# Altium PCB PCB1.PcbDoc
Units mm, origin at the board's own origin, x right, y up, seen from the top; angles counter-clockwise.
Board outline 68.2 x 88.27 mm, 2 copper layers (Top Layer, Bottom Layer); 35 components, 35 nets, 145 pads, 44 vias.
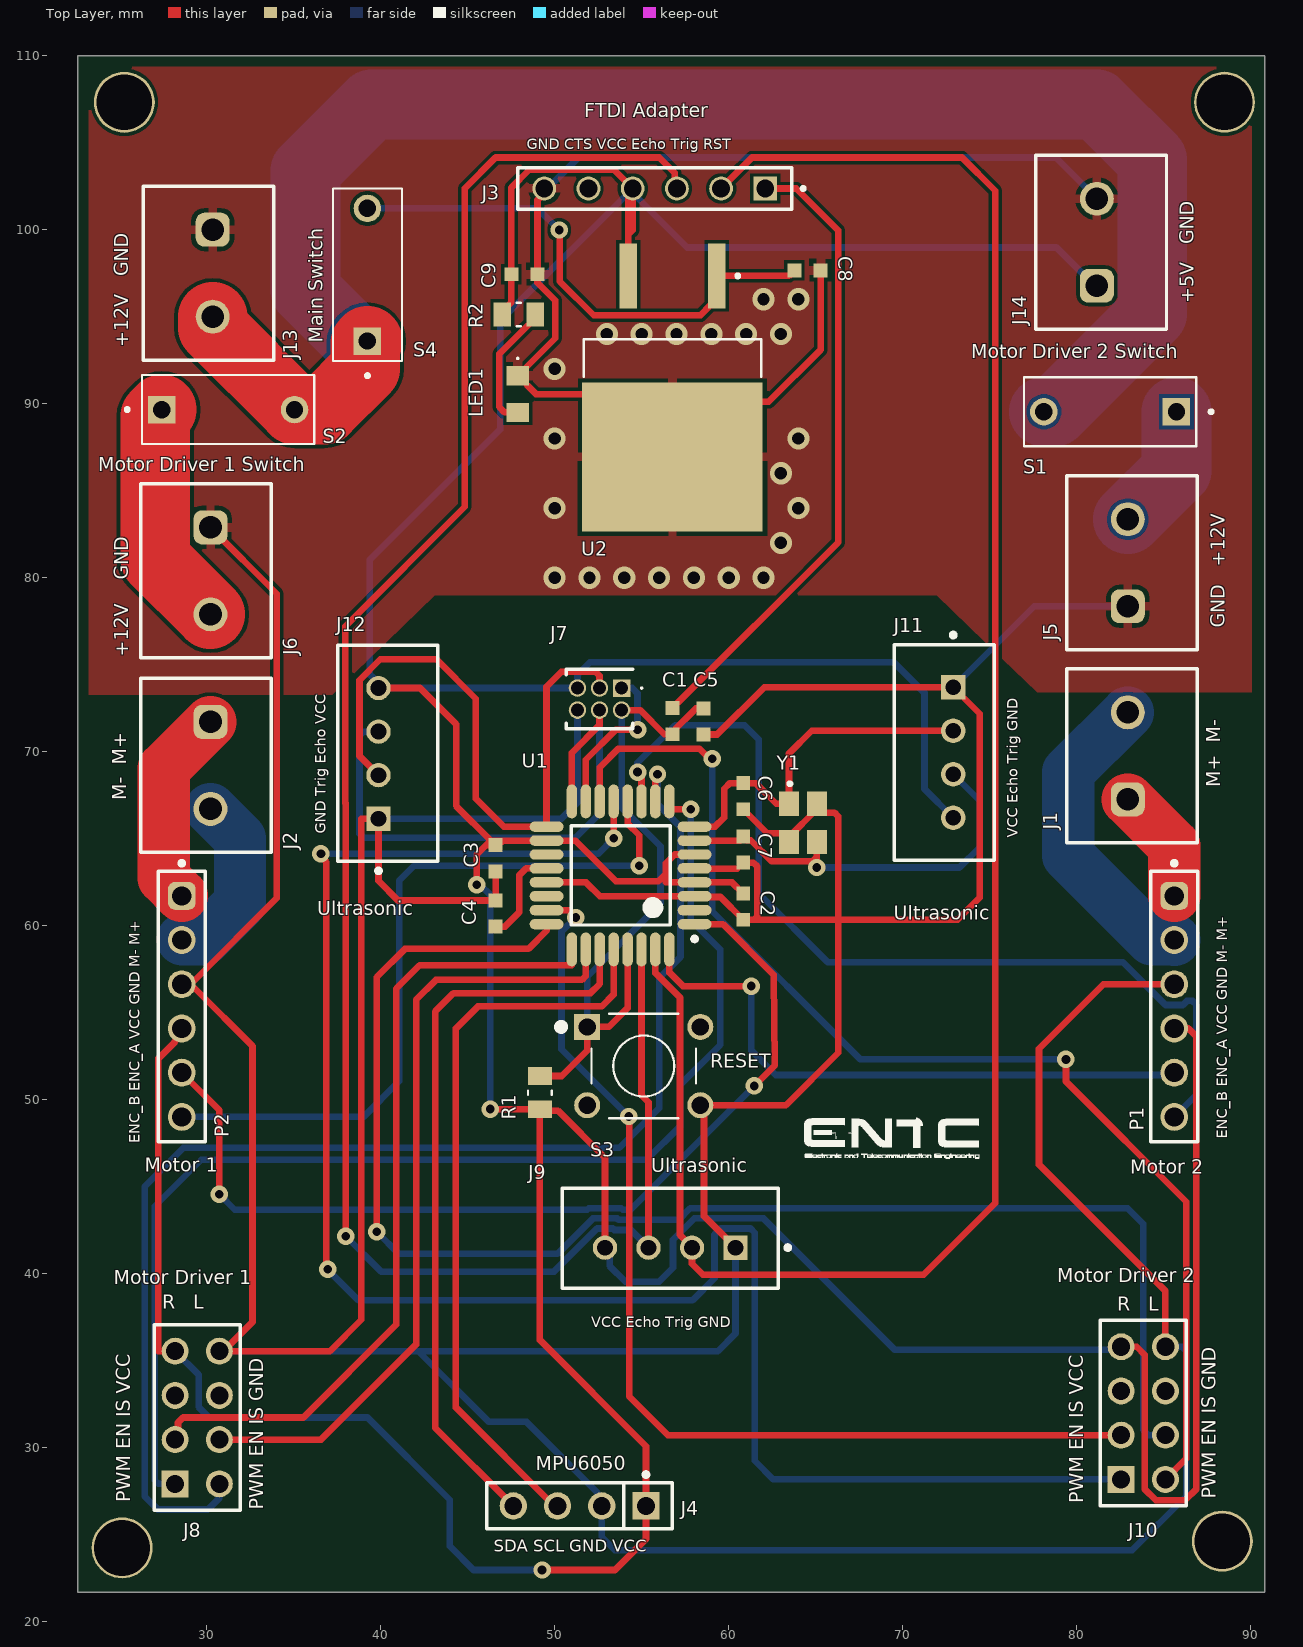
[diagram p0: Top Layer view]
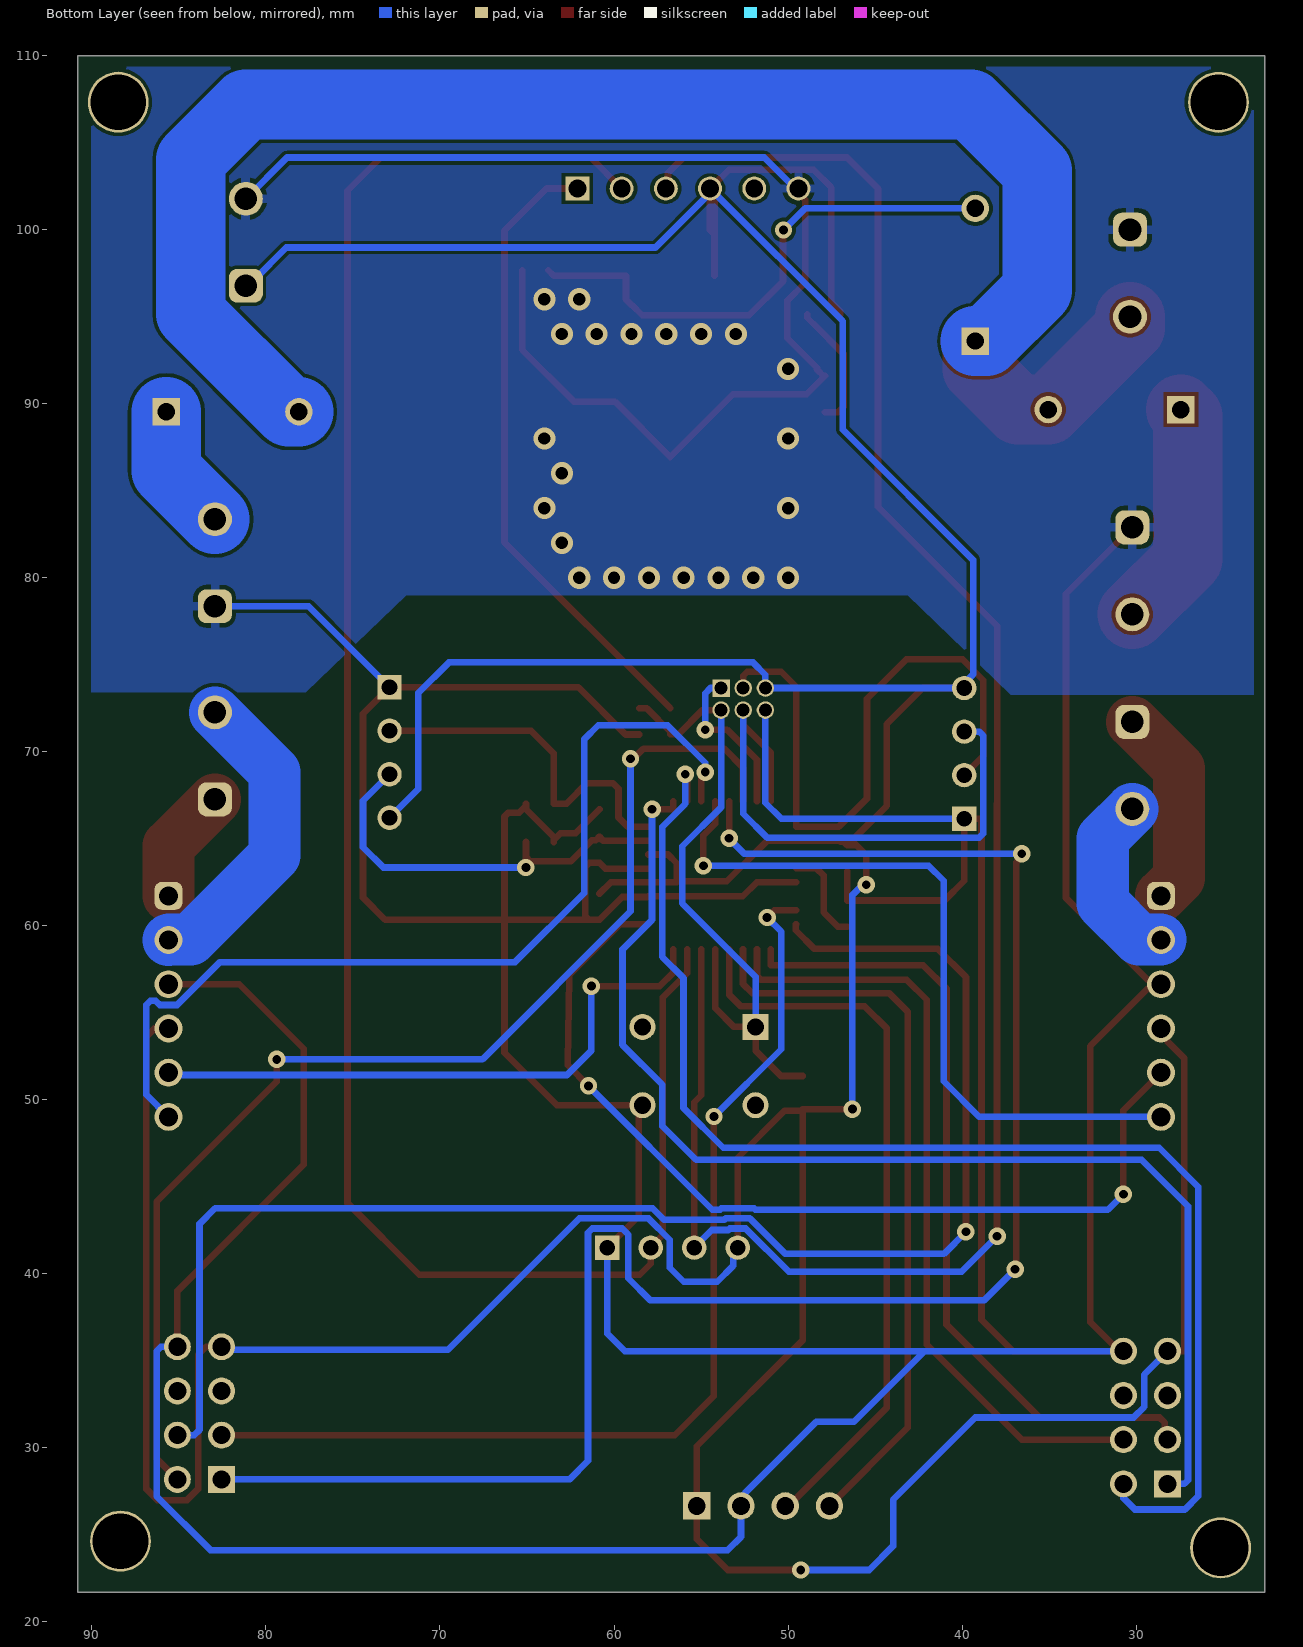
[diagram p1: Bottom Layer view, seen from below]
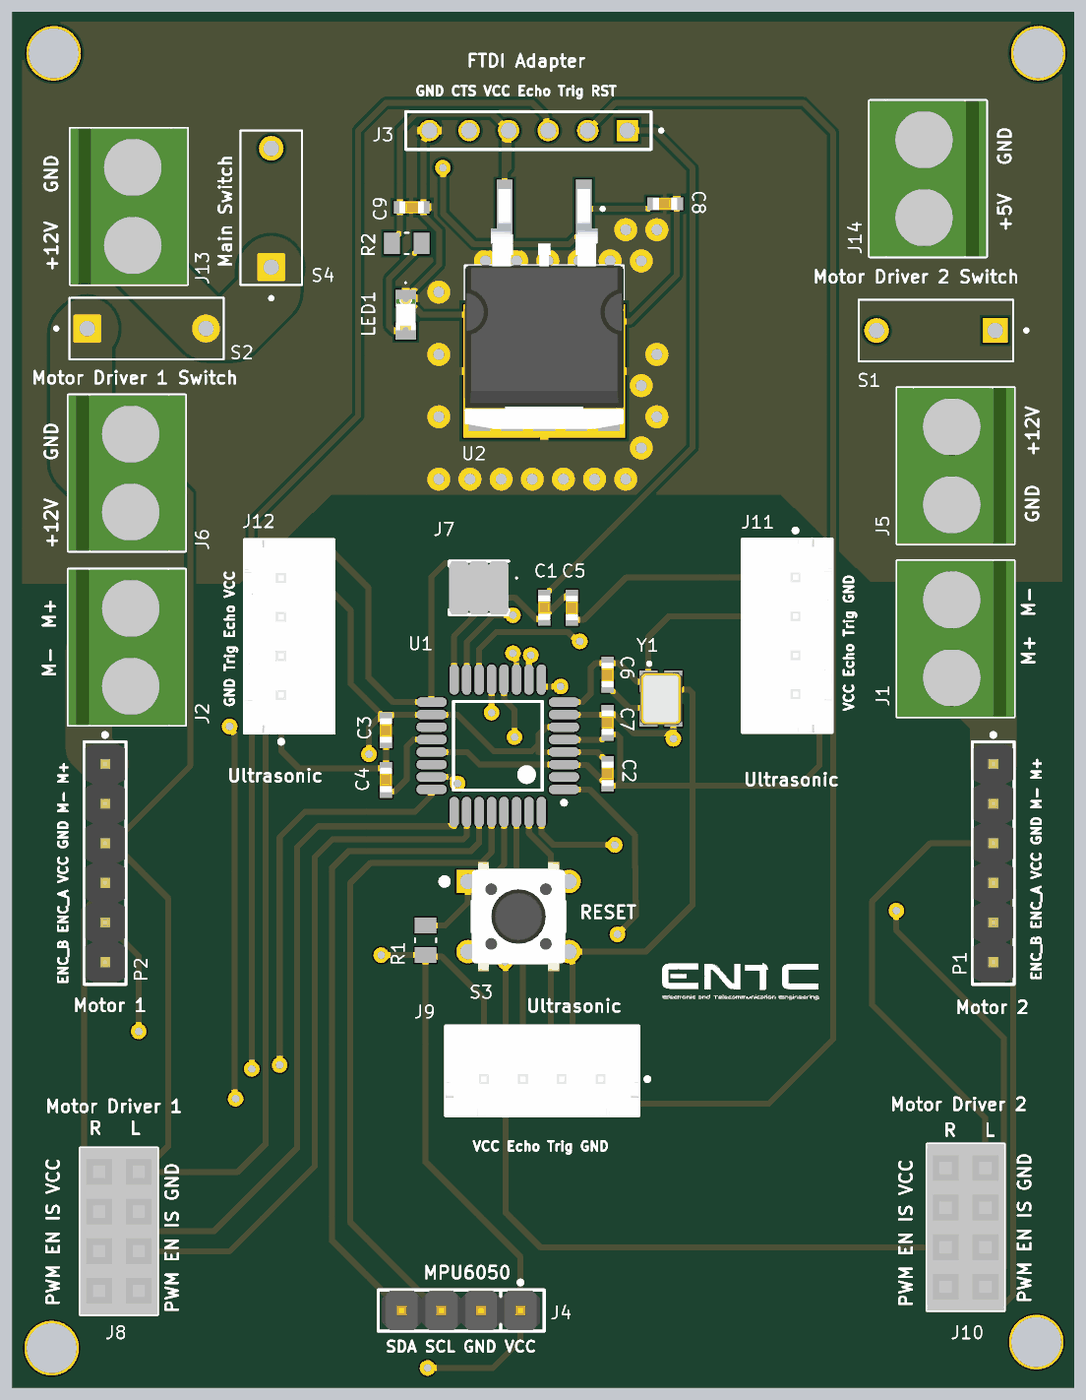
[diagram p2: 3D render of the assembled board from above, using the file's embedded part models]

## Layer stack, top to bottom
Top Solder: solder mask 0.0102, Solder Resist, Dk 3.5
Top Layer: signal copper 0.0356
Dielectric 1: dielectric 0.32, FR-4, Dk 4.8
Bottom Layer: signal copper 0.0356
Bottom Solder: solder mask 0.0102, Solder Resist, Dk 3.5

## Board outline
22.606,21.717 90.805,21.717 90.805,109.982 22.606,109.982

## Design rules (kind name [scope] priority, off if disabled: settings)
BoardOutlineClearance [All] p1: gap=0.2 ignorepadtopadclearanceinfootprint=FALSE except(0.4: Arc-SplitBarrior Arc-SplitContinuation Track-SplitBarrior Track-SplitContinuation SMDPad-SplitBarrior SMDPad-SplitContinuation THPad-SplitBarrior THPad-SplitContinuation Via-SplitBarrior Via-SplitContinuation Fill-SplitBarrior Fill-SplitContinuation Poly-SplitBarrior Poly-SplitContinuation Region-SplitBarrior Region-SplitContinuation Text-SplitBarrior Text-SplitContinuation)
Clearance "Clearance Bottom Layer" [OnLayer('Bottom Layer')] p1: gap=0.203 ignorepadtopadclearanceinfootprint=TRUE except(0.254: Arc-Text Track-Text SMDPad-Text THPad-Text Via-Text Fill-Text Poly-Text Region-Text Text-Text)
Clearance "Clearance Top Layer" [OnLayer('Top Layer')] p2: gap=0.203 ignorepadtopadclearanceinfootprint=TRUE except(0.254: Arc-Text Track-Text SMDPad-Text THPad-Text Via-Text Fill-Text Poly-Text Region-Text Text-Text)
Clearance [All] p3: gap=0.2 ignorepadtopadclearanceinfootprint=FALSE except(0.089: Arc-Arc Arc-Track Arc-SMDPad Track-Track Track-SMDPad SMDPad-SMDPad; 0.127: Arc-Via Track-Via SMDPad-Via THPad-Via Via-Via; 0.254: Arc-Text Track-Text SMDPad-Text THPad-Text Via-Text Fill-Text Poly-Text Region-Text Text-Text)
HoleSize [All] p1: absolutevalues=TRUE maxlimit=6.3 minlimit=0.2 maxpercent=80.000 minpercent=20.000
MinimumAnnularRing [All] p1: minimumring=0.076
MinimumSolderMaskSliver [All] p1: minsoldermaskwidth=0.1
PolygonConnect PolygonConnect_1 [All] p1: thpad.connectstyle=Relief thpad.reliefconductorwidth=0.508 thpad.reliefentries=4 thpad.polygonreliefangle="90 Angle" thpad.airgapwidth=0.254 smdpad.connectstyle=Relief smdpad.reliefconductorwidth=0.508 smdpad.reliefentries=4 smdpad.polygonreliefangle="90 Angle" smdpad.airgapwidth=0.254 via.connectstyle=Direct via.reliefconductorwidth=0.508 via.reliefentries=4 via.polygonreliefangle="90 Angle" via.airgapwidth=0.254
RoutingCorners [All] p1: cornerstyle=Round minsetback=2.54 maxsetback=2.54
RoutingVias [All] p1: holewidth=0.5 width=1 viastyle="Through Hole" minholewidth=0.2 minwidth=0.45 maxholewidth=1 maxwidth=2
SilkToSilkClearance [All] p1: silktosilkclearance=0.1
SilkToSolderMaskClearance [IsPad] p1: minsilkscreentomaskgap=0.1 clearancetoexposedcopper=TRUE
SolderMaskExpansion [All] p1: expansion=0.102 istentingtop=FALSE
Width motor_1_2 [InNet('NetJ1_2')] p1: maxlimit=4 minlimit=3 preferedwidth=4
Width motor_1_1 [InNet('NetJ1_1')] p2: maxlimit=4 minlimit=3 preferedwidth=4
Width motor_2_2 [InNet('NetJ2_2')] p3: maxlimit=4 minlimit=3 preferedwidth=4
Width motor_2_1 [InNet('NetJ2_1')] p4: maxlimit=4 minlimit=3 preferedwidth=4
Width 12V_3 [InNet('NetJ5_2')] p5: maxlimit=6 minlimit=4 preferedwidth=5
Width 12V_2 [InNet('NetJ6_2')] p6: maxlimit=6 minlimit=4 preferedwidth=5
Width 12V [InNet('+12V')] p7: maxlimit=6 minlimit=4 preferedwidth=5
Width [All] p8: maxlimit=2.54 minlimit=0.089 preferedwidth=0.381
25 further rules are at their usual default settings.

## Components (designator, comment, footprint, x,y, rotation, side; value= is the part's Value field where it differs from the comment)
C1 "100nF" WCAP-CSST_0603_L1.6W0.8H0.8_Reflow 56.769,71.755 r270 top
C2 "10nF" WCAP-CSST_0603_L1.6W0.8H0.8_Reflow 60.833,61.099 r90 top
C3 "10nF" WCAP-CSST_0603_L1.6W0.8H0.8_Reflow 46.609,63.881 r90 top
C4 "100nF" WCAP-CSST_0603_L1.6W0.8H0.8_Reflow 46.609,60.706 r270 top
C5 "100nF" WCAP-CSST_0603_L1.6W0.8H0.8_Reflow 58.547,71.743 r90 top
C6 "22pF" WCAP-CSGP_0603_L1.6W0.8H0.8_Reflow 60.833,67.449 r90 top
C7 "22pF" WCAP-CSGP_0603_L1.6W0.8H0.8_Reflow 60.833,64.377 r90 top
C8 "100nF" WCAP-CSST_0603_L1.6W0.8H0.8_Reflow 64.528,97.663 r180 top
C9 "100nF" WCAP-CSST_0603_L1.6W0.8H0.8_Reflow 48.26,97.434 r180 top
J1 "691137710002" 691137710002 83.181,69.763 r90 top
J2 "691137710002" 691137710002 29.972,69.215 r270 top
J3 "ESQ-106-59-G-S" SAMTEC_ESQ-106-59-G-S 62.103,102.362 r180 top
J4 "MPU6050" FP-M20-9990445-MFG 51.435,26.67 r180 top
J5 "691137710002" 691137710002 83.181,80.859 r90 top
J6 "691137710002" 691137710002 29.972,80.391 r270 top
J7 "20021111-00006T4LF" 2002111100006T4LF 53.848,73.66 r180 top
J8 "Motor Driver 1" SMTC-SSW-104-02-X-D 28.194,27.94 r90 top
J9 "Ultrasonic 1" FP-B4B-XH-A_LF_SN-MFG 56.642,42.037 r0 top
J10 "Motor Driver 2" SMTC-SSW-104-02-X-D 82.55,28.194 r90 top
J11 "Ultrasonic 2" FP-B4B-XH-A_LF_SN-MFG 72.373,69.957 r90 top
J12 "Ultrasonic 3" FP-B4B-XH-A_LF_SN-MFG 40.403,69.91 r270 top
J13 "691137710002" 691137710002 30.103,97.496 r270 top
J14 "691137710002" 691137710002 81.403,99.274 r90 top
LED1 "150080SS75000" 150080SS75000 47.879,90.551 r270 top
P1 "Motor 1" 61300611121 85.598,55.372 r270 top
P2 "Motor 2" 61300611121 28.575,55.372 r270 top
R1 "RMCF0805FG10K0" RESC2012X65N 49.149,50.419 r270 top value=10kohm
R2 "RMCF0805FG10K0" RESC2012X65N 47.945,95.123 r180 top value=10kohm
S1 "DS01-254-L-01BE" SW_DS01-254-L-01BE 81.915,89.535 r90 top
S2 "DS01-254-L-01BE" SW_DS01-254-L-01BE 31.242,89.662 r270 top
S3 "FSM8JH" SW_FSM8JH 55.118,51.943 r0 top
S4 "DS01-254-L-01BE" SW_DS01-254-L-01BE 39.243,97.409 r0 top
U1 "ATmega328P-AU" 32A_M 53.789,62.897 r180 top
U2 "7805CD2T" TO254P1542X460-3N 56.769,90.932 r270 top
Y1 "830072604" WE-XTAL_CFPX-180 64.262,65.913 r270 top

## Footprints (in the part's own frame and the unit in brackets; to place one, negate y for a bottom-side part, rotate by r counter-clockwise, add the part's x,y. Pads: shape width x height; smd on the part's side, far side on the other; paste and mask are expansions set on the pad)
32A_M [mm] "Thin QFP, 32-Leads, Body 7x7mm, Pitch 0.8mm, IPC Low Density"
  oval 1.95x0.6 smd: 1(-4.25,2.8) 2(-4.25,2) 3(-4.25,1.2) 4(-4.25,0.4) 5(-4.25,-0.4) 6(-4.25,-1.2) 7(-4.25,-2) 8(-4.25,-2.8) 17(4.25,-2.8) 18(4.25,-2) 19(4.25,-1.2) 20(4.25,-0.4) 21(4.25,0.4) 22(4.25,1.2) 23(4.25,2) 24(4.25,2.8)
  oval 0.6x1.95 smd: 9(-2.8,-4.25) 10(-2,-4.25) 11(-1.2,-4.25) 12(-0.4,-4.25) 13(0.4,-4.25) 14(1.2,-4.25) 15(2,-4.25) 16(2.8,-4.25) 25(2.8,4.25) 26(2,4.25) 27(1.2,4.25) 28(0.4,4.25) 29(-0.4,4.25) 30(-1.2,4.25) 31(-2,4.25) 32(-2.8,4.25)
  silkscreen extent -4.38,-2.85 2.85,3.77, body extent -3.5,-3.5 3.5,3.5, height 1.2
150080SS75000 [mm]
  rect 1.1x1.3 smd: 1(-1.05,0) 2(1.05,0)
  silkscreen extent -2.1,-0.05 -2,0.05, body extent -1,-0.63 1,0.63, height 0.7
61300611121 [mm] "Pin Header, pitch 2.54 mm, THT, Vertical, single row, 6p"
  rrect50% 1.6x1.6 hole 1.1: 1(-6.35,0)
  round 1.6 hole 1.1: 2(-3.81,0) 3(-1.27,0) 4(1.27,0) 5(3.81,0) 6(6.35,0)
  silkscreen extent -8.34,-1.34 7.77,1.34, body extent -7.62,-1.27 7.62,1.27, height 8.57
691137710002 [mm] "Horizontal Cable Entry with Pressure Clamp, pitch 5mm, 02p"
  rrect50% 1.95x1.95 hole 1.3: 1(-2.5,0.25)
  round 1.95 hole 1.3: 2(2.5,0.25)
  silkscreen extent -5,-3.75 5,3.75, body extent -5,-3.75 5,3.75, height 11.6
2002111100006T4LF [mm]
  rect 1x1 hole 0.75: 1(0,0)
  round 1 hole 0.75: 2(0,1.27) 3(1.27,0) 4(1.27,1.27) 5(2.54,0) 6(2.54,1.27)
  silkscreen extent -1.2,-1.08 3.17,2.35, body extent -0.64,-1.07 3.17,2.33, height 5.58
FP-B4B-XH-A_LF_SN-MFG [mm]
  rect 1.4x1.4 hole 0.9 paste-2539.97 mask+0: 1(3.75,-0.525)
  round 1.4 hole 0.9 paste-2539.97 mask+0: 2(1.25,-0.525) 3(-1.25,-0.525) 4(-3.75,-0.525)
  silkscreen extent -6.2,-2.87 6.88,2.88, body extent -6.3,-2.98 6.3,2.98, height 0.25
FP-M20-9990445-MFG [mm]
  rect 1.57x1.57 hole 1.02 paste-2539.97 mask+0: 1(-3.81,0)
  round 1.57 hole 1.02 paste-2539.97 mask+0: 2(-1.27,0) 3(1.27,0) 4(3.81,0)
  silkscreen extent -5.33,-1.92 5.33,1.32, body extent -5.43,-1.42 5.43,1.42, height 0.25
RESC2012X65N [mm]
  rect 1.01x1.38 smd: 1(-0.95,0) 2(0.95,0)
  silkscreen extent -0.12,-0.68 0.12,0.68
SAMTEC_ESQ-106-59-G-S [mm]
  rect 1.37x1.37 hole 1.02: 01(0,0)
  round 1.37 hole 1.02: 02(2.54,0) 03(5.08,0) 04(7.62,0) 05(10.16,0) 06(12.7,0)
  silkscreen extent -2.27,-1.2 14.23,1.2
SMTC-SSW-104-02-X-D [mm] "SQ Post Socket, 2x4 Pins, Vertical, 2.54mm Pitch, Female"
  rect 1.55x1.55 hole 1.04: 1(0,0)
  round 1.55 hole 1.04: 2(0,-2.54) 3(2.54,0) 4(2.54,-2.54) 5(5.08,0) 6(5.08,-2.54) 7(7.62,0) 8(7.62,-2.54)
  silkscreen extent -1.53,-3.74 9.15,1.2, body extent -1.52,-3.75 9.14,1.21, height 8.51
SW_DS01-254-L-01BE [mm]
  rect 1.58x1.58 / inner round 1.58 / far side rect 1.58x1.58 hole 1: 1A(0,-3.81)
  round 1.58 hole 1: 1B(0,3.81)
  silkscreen extent -1.98,-5.9 1.98,4.95
SW_FSM8JH [mm]
  rect 1.498x1.498 / inner round 1.498 / far side rect 1.498x1.498 hole 0.99: 1(-3.25,2.25)
  round 1.498 hole 0.99: 2(-3.25,-2.25) 3(3.25,2.25) 4(3.25,-2.25)
  silkscreen extent -4.95,-3 3,3, body extent -3,-3.95 3,3.95, height 9.5
TO254P1542X460-3N [mm]
  rect 3.74x1.02 smd: 1(-6.41,2.54) 2(-6.41,-2.54)
  rect 8.56x10.37 smd paste-6: 3(4,0)
  silkscreen extent -6.51,-5.1 -0.59,5.1, body extent -7.71,-5.1 7.71,5.1, height 4.6
WCAP-CSGP_0603_L1.6W0.8H0.8_Reflow [mm] "Ceramic Capacitors, body 1.6x0.8mm"
  rect 0.8x0.8 smd: 1(-0.75,0) 2(0.75,0)
  body extent -0.8,-0.4 0.8,0.4, height 0.8
WCAP-CSST_0603_L1.6W0.8H0.8_Reflow [mm] "Soft Termination MLCC, body 1.60x0.80mm"
  rect 0.8x0.8 smd: 1(-0.75,0) 2(0.75,0)
  body extent -0.8,-0.4 0.8,0.4, height 0.8
WE-XTAL_CFPX-180 [mm] "Quartz Crystal, size CFPX-180, body 3.4x2.7mm"
  rect 1.4x1.15 smd: 1(-1.1,-0.8) 2(1.1,-0.8) 3(1.1,0.8) 4(-1.1,0.8)
  silkscreen extent -2.35,-0.85 -2.15,-0.65, body extent -1.7,-1.35 1.7,1.35, height 0.65

## Part data
C1 C4 C5 C9: library part 885382206004, "WCAP-CSST Multilayer Ceramic Chip Capacitor, Soft Termination, size 0603, X7R Class II, 100nF, 50VDC", Capacitance Tolerance=+/-10%, Case/Size Code=0603, Insulation Resistance=5GOhm, Manufacturer="Wurth Elektronik", Operating Temperature Max=125°C, Operating Temperature Min=-55°C, Rated Voltage (DC)=50V, Capacitance=100nF, Category="Multilayer Ceramic Chip Capacitors", Ceramic Type="X7R Class II", ComponentLink1Description="Website Link", ComponentLink1URL=https://www.we-online.com/redexpert/article/885382206004?ad, ComponentLink2Description="Datasheet Link", ComponentLink2URL=https://www.we-online.com/redexpert/spec/885382206004?ad, Dissipation Factor=3%, Height=0.8mm, Length=1.6mm, Manufacturer Part Number=885382206004, Match Code=WCAP-CSST, Mount="Surface Mount", Packaging="Tape and Reel", Technical Reference=X7R0603104K050DFCT1S000, Width=0.8mm
C2 C3: library part 885382206002, "WCAP-CSST Multilayer Ceramic Chip Capacitor, Soft Termination, size 0603, X7R Class II, 10nF, 50VDC", Capacitance Tolerance=+/-10%, Case/Size Code=0603, Insulation Resistance=10GOhm, Manufacturer="Wurth Elektronik", Operating Temperature Max=125°C, Operating Temperature Min=-55°C, Rated Voltage (DC)=50V, Capacitance=10nF, Category="Multilayer Ceramic Chip Capacitors", Ceramic Type="X7R Class II", ComponentLink1Description="Website Link", ComponentLink1URL=https://www.we-online.com/redexpert/article/885382206002?ad, ComponentLink2Description="Datasheet Link", ComponentLink2URL=https://www.we-online.com/redexpert/spec/885382206002?ad, Dissipation Factor=2.5%, Height=0.8mm, Length=1.6mm, Manufacturer Part Number=885382206002, Match Code=WCAP-CSST, Mount="Surface Mount", Packaging="Tape and Reel", Technical Reference=X7R0603103K050DFCT1S000, Width=0.8mm
C6 C7: library part 885012006004, "WCAP-CSGP Multilayer Ceramic Chip Capacitor, General Purpose, size 0603, NP0, 22pF, 10VDC", Capacitance Tolerance=+/-5%, Case/Size Code=0603, Insulation Resistance=10GOhm, Manufacturer="Wurth Elektronik", Operating Temperature Max=125°C, Operating Temperature Min=-55°C, Rated Voltage (DC)=10V, Capacitance=22pF, Category="Multilayer Ceramic Chip Capacitors", Ceramic Type=NP0, ComponentLink1Description="Website Link", ComponentLink1URL=https://www.we-online.com/redexpert/article/885012006004?ad, ComponentLink2Description="Datasheet Link", ComponentLink2URL=https://www.we-online.com/redexpert/spec/885012006004?ad, Height=0.8mm, Length=1.6mm, Manufacturer Part Number=885012006004, Match Code=WCAP-CSGP, Mount="Surface Mount", Packaging="Tape and Reel", Q Factor=840, Technical Reference=NP00603220J010DFCT10000, Width=0.8mm
C8: library part 885382206004, "WCAP-CSST Multilayer Ceramic Chip Capacitor, Soft Termination, size 0603, X7R Class II, 100nF, 50VDC", Capacitance=0.33uF, Capacitance Tolerance=+/-10%, Case/Size Code=0603, Insulation Resistance=5GOhm, Manufacturer="Wurth Elektronik", Operating Temperature Max=125°C, Operating Temperature Min=-55°C, Rated Voltage (DC)=50V, Category="Multilayer Ceramic Chip Capacitors", Ceramic Type="X7R Class II", ComponentLink1Description="Website Link", ComponentLink1URL=https://www.we-online.com/redexpert/article/885382206004?ad, ComponentLink2Description="Datasheet Link", ComponentLink2URL=https://www.we-online.com/redexpert/spec/885382206004?ad, Dissipation Factor=3%, Height=0.8mm, Length=1.6mm, Manufacturer Part Number=885382206004, Match Code=WCAP-CSST, Mount="Surface Mount", Packaging="Tape and Reel", Technical Reference=X7R0603104K050DFCT1S000, Width=0.8mm
J1 J2 J5 J6 J13 J14: library part CMP-1502-03324-2, Current Rating=16A, Max Operating Temperature=120°C, Min Operating Temperature=-30°C, Voltage Rating=300V, Contact Material="Nickel, Tin", Height=11.6mm, Lead Pitch=5mm, NexarPartId=78871135, Number of Contacts=2, Number of Pins=2, Number of Rows=1, Packaging=Box, RoHS=Non-Compliant
J3 R1 R2: Package=None, Availability=Unavailable, Price=None
  J3: MP=ESQ-106-59-G-S
  R1 R2: MP=RMCF0805FG10K0
J4: library part CMP-00671-05399696-1, "M20-9990445 Conn Unshrouded Header HDR 4 POS 2.54mm Solder ST Thru-Hole Bulk/Loose", Case/Package=SIL, Color=Black, Contact Resistance=25mΩ, Current Rating=3A, Insulation Resistance=10GΩ, Max Operating Temperature=105°C, Min Operating Temperature=-40°C, Voltage Rating (AC)=750V, Connector Type="Male Pin", Contact Material="Brass, Bronze, Gold, Nickel", Contact Mating Length=6.096mm, Contact Plating=Gold, Depth=2.54mm, Gender=Male, Height=2.54mm, Housing Color=Black, Housing Material=Nylon, Lead Pitch=2.54mm, Length=10.16mm, Max Current Rating=3A, Mount="Through Hole", NexarPartId=5399696, Number of Contacts=4, Number of Pins=4, Number of Positions=4, Number of Rows=1, Orientation=Straight, Pitch=2.54mm, Radiation Hardening=No, REACH SVHC="No SVHC", RoHS=Compliant, Termination=Solder, Voltage Rating (DC)=750V, Weight=45.359237g, Width=12.7mm
J7: "Connector", Manufacturer_Name="Amphenol Communications Solutions", Arrow Part Number=20021111-00006T4LF, Arrow Price/Stock=https://www.arrow.com/en/products/20021111-00006t4lf/amphenol-fci?region=europe, Datasheet Link=https://cdn.amphenol-cs.com/media/wysiwyg/files/drawing/20021111.pdf, Height=5mm, Manufacturer_Part_Number=20021111-00006T4LF
J8 J10: library part CMP-1023-00343-1, "SQ Post Socket, Through-hole, Vertical, -55 to 125 degC, 2.54mm Pitch, 8-Pin, Female, RoHS", Manufacturer=Samtec, PartNumber=SSW-104-02-G-D, Temperature Range="-55 to 125 degC", ComponentLink1Description="Manufacturer URL", ComponentLink1URL=http://www.samtec.com, ComponentLink2Description=Datasheet, ComponentLink2URL=http://www.samtec.com/documents/webfiles/pdf/SSW_TH.PDF, ComponentLink3Description="Package Specification", ComponentLink3URL=http://www.samtec.com/documents/webfiles/cpdf/SSW-1XX-XX-XXX-X-XX-XXX-XX-MKT.pdf, DatasheetVersion=F-214, Mounting Technology=Through-hole, Orientation=Vertical, PackageDescription="Assembly, Socket Strip .016 X .031 Tail", PackageReference=SSW-104-02-X-D, PackageVersion="CA, 6/1987", Pitch="2.54 mm", RoHS=True
J9 J11 J12: library part CMP-17439-000250-1, "CONN HEADER VERT 4POS 2.5MM", Color=Natural, Contact Resistance=20mR, Current Rating=3A, Flammability Rating="UL94 V-0", Housing Color=White, Insulation Resistance=1GR, Max Operating Temperature=85°C, Max Voltage Rating (AC)=250V, Min Operating Temperature=-25°C, Package Quantity=500, Connector Type=Header, Contact Finish - Mating=TIN, Contact Material=Brass, Contact Plating=Tin, Contact Shape=Square, Contact Type="Male Pin", Depth=5.75mm, Fastening Type=Detent, Gender=Male, Housing Material=Polyamide, Insulation Color=Natural, Insulation Material=Nylon, Lead Free="Lead Free", Lead Pitch=2.5mm, Length=12.4mm, Mated Stacking Heights=9.8mm, Material=Polyamide, Max Current Rating=3A, Max Voltage Rating (DC)=250V, Mount="Through Hole", Number of Contacts=4, Number of Positions=4, Number of Rows=1, Orientation=Straight, Packaging=Bulk, Pitch=2.5mm, REACH SVHC="No SVHC", Series=XH, Termination=Solder, Voltage Rating=250V, Voltage Rating (AC)=250V, Wire/Cable Gauge=22AWG
LED1: "LED", Manufacturer_Name="Wurth Elektronik", Mouser Part Number=710-150080SS75000, Datasheet Link=https://www.we-online.com/components/products/datasheet/150080SS75000.pdf, Height=0.8mm, Manufacturer_Part_Number=150080SS75000, Mouser Price/Stock=https://www.mouser.co.uk/ProductDetail/Wurth-Elektronik/150080SS75000?qs=LlUlMxKIyB2zzpiaOzrUdw%3D%3D
P1 P2: library part CMP-1502-01070-3, Color=Black, Contact Resistance=20mΩ, Current Rating=3A, Max Operating Temperature=105°C, Min Operating Temperature=-40°C, Operating Supply Voltage=250V, Connector Type="Male Pin", Contact Gender=Male, Contact Material=Copper, Contact Mating Length=5.9944mm, Contact Plating=Gold, Gender=Male, Height=8.89mm, Housing Material=PBT, Lead Free="Lead Free", Lead Pitch=2.54mm, Mount="Through Hole", NexarPartId=20084590, Number of Contacts=6, Number of Pins=6, Number of Positions=6, Number of Rows=1, Orientation=Vertical, Packaging=Bulk, Pitch=2.54mm, REACH SVHC=Unknown, RoHS=Compliant, Termination="Through Hole", Voltage Rating=250V
S1 S2 S4: "1 Position, Through Hole, 2.54 mm Pitch, Raised Slide Actuator, Flat Bottom, Long Pin, DIP Switch", Package=None, Availability="In Stock", Check_prices=https://www.snapeda.com/parts/DS01-254-L-01BE/CUI+Devices/view-part/?ref=eda, CUI_purchase_URL=https://www.cuidevices.com/product/switches/dip-switches/ds01-254-series?utm_source=snapeda.com&utm_medium=referral&utm_campaign=snapedaBOM, MF="CUI Devices", MP=DS01-254-L-01BE, Price=None, Purchase-URL=https://pricing.snapeda.com/search/part/DS01-254-L-01BE/?ref=eda, SnapEDA_Link=https://www.snapeda.com/parts/DS01-254-L-01BE/CUI+Devices/view-part/?ref=snap
S3: "Tactile Switch SPST-NO Top Actuated Through Hole", Package=None, Availability="In Stock", Check_prices=https://www.snapeda.com/parts/FSM8JH/TE+Connectivity+ALCOSWITCH+Switches/view-part/?ref=eda, MF="TE Connectivity", MP=FSM8JH, Price=None, SnapEDA_Link=https://www.snapeda.com/parts/FSM8JH/TE+Connectivity+ALCOSWITCH+Switches/view-part/?ref=snap
U1: library part CMP-0095-00269-2, "8-bit AVR Microcontroller, 32KB Flash, 1KB EEPROM, 2KB SRAM, 32-pin TQFP, Industrial Grade (-40°C to 85°C)", Code_JEDEC=MS-026-ABA, ComponentLink1Description="Manufacturer URL", ComponentLink1URL=http://www.atmel.com/, ComponentLink2Description="ATmega48A/48PA/88A/88PA/168A/168PA/328/328P Datasheet", ComponentLink2URL=http://www.atmel.com/dyn/resources/prod_documents/doc8271.pdf, ComponentLink3Description="ATmega48A/48PA/88A/88PA/168A/168PA/328/328P Summary", ComponentLink3URL=http://www.atmel.com/dyn/resources/prod_documents/8271S.pdf, DatasheetVersion="revD, May-2011", PackageDescription="32-Lead, 7x7x1.0 mm Body, 0.8mm Lead Pitch, Thin Profile Plastic Quad Flat Package (TQFP)", PackageReference=32A, PackageVersion="revC, Oct-2010", RevisionNote="DatasheetVersion & PackageVersion updated. URLs added."
U2: "Linear Voltage Regulator IC Positive Fixed 1 Output 1.5A D2PAK", Package="D2PAK STMicroelectronics", Check_prices=https://www.snapeda.com/parts/7805CD2T/STMicroelectronics/view-part/?ref=eda, MF=STMicroelectronics, MP=7805CD2T, SnapEDA_Link=https://www.snapeda.com/parts/7805CD2T/STMicroelectronics/view-part/?ref=snap
Y1: library part CMP-03913-116876517-1, "830072604 WE-XTAL Quartz Crystal", Frequency=25MHz, Max Operating Temperature=85°C, Min Operating Temperature=-40°C, Height=800µm, Length=3.2mm, NexarPartId=116876517, Width=2.5mm

## Free pads (board coordinates)
  round 3.5 hole 3.2: 8(25.146,24.257) 8(25.273,107.315) 8(88.359,24.645) 8(88.486,107.322)

## Via types
v1: diameter 1, hole 0.5, Top Layer to Bottom Layer, 22 vias
v2: diameter 1.27, hole 0.711, Top Layer to Bottom Layer, 22 vias

## Nets (pads, with @x,y where several pads share a name; then routed paths per layer and width w, separated by ;. In a path a pad name is that pad's centre, name@x,y a point inside that pad or via, vN(x,y) a via of type N, cw(c..) or ccw(c..) an arc to the next point about the centre after c; other vN are vias at no path point)
+5: C4.2 U1.20 | length 5.6
  Top Layer w0.381: C4.2 47.142,59.956 47.955,60.769 47.955,62.891 48.362,63.297 U1.20
+5V: C2.2 C3.2 C9.2 J3.04 J4.1 J7.5 J8.7 J9.4 J10.7 J11.4 J12.4 J14.1 P1.4 P2.4 R1.2 R2.2 U1.4 U1.6 U1.18 U2.2 | length 370.5
  Top Layer w0.381: J8.7 27.229,35.56 ; P2.4 28.575,53.772 28.177,53.374 28.177,53.323 27.229,52.375 ; J12.4 42.266,73.66 44.335,71.591 44.335,66.892 C3.2@46.33,64.897 ; v1(45.517,62.357) 45.517,64.084 46.064,64.631 ; v1(46.304,49.469) R1.2 ; R2.2 46.995,95.308 47.51,95.823 C9.2 47.51,102.413 48.538,103.441 53.404,103.441 J3.04@54.229,102.616 ; v1(49.276,22.987) 53.467,22.987 55.245,24.765 J4.1 55.245,30.099 49.149,36.195 R1.2 ; J9.4 52.892,46.676 50.187,49.381 49.237,49.381 R1.2 ; U2.2 54.229,99.72 ; J3.04 54.483,99.974 54.229,99.72 ; U1.6 56.896,64.097 56.393,63.594 56.393,62.992 ; C2.2 60.185,62.497 U1.4 56.393,62.497 56.393,62.992 ; J10.7 83.439,35.814 83.896,35.357 83.896,27.635 84.531,27 86.233,27 86.868,27.635 86.868,53.645 86.411,54.102 P1.4 ; 27.229,35.56 27.229,52.375 ; 27.229,35.56 27.229,52.375 ; 46.064,64.631 C3.2 46.818,64.841 46.985,64.841 47.042,64.897 ; 46.064,64.631 C3.2@46.33,64.897 ; C3.2@46.33,64.897 47.042,64.897 ; C3.2@46.33,64.897 47.042,64.897 ; 47.042,64.897 U1.18 51.181,64.897 53.523,62.555 55.956,62.555 56.393,62.992 ; 54.229,99.72 J3.04@54.229,102.616 ; 54.229,99.72 J3.04@54.229,102.616
  Bottom Layer w0.381: J8.7 29.54,34.214 29.54,32.36 30.15,31.75 39.243,31.75 43.967,27.026 43.967,24.359 45.339,22.987 v1(49.276,22.987) ; v1(45.517,62.357) 45.72,62.357 46.304,61.773 v1(46.304,49.469) ; J9.4 52.892,41.236 53.157,40.971 53.157,40.461 54.072,39.547 55.993,39.547 56.798,40.352 56.798,41.965 58.023,43.19 62.002,43.19 69.557,35.635 82.371,35.635 J10.7 ; J3.04 J3.04@54.483,102.108 ; J11.4 71.247,67.858 71.247,73.381 69.49,75.138 52.019,75.138 51.308,74.427 J7.5 J12.4 39.878,73.936 39.498,74.316 39.37,74.444 39.37,81.026 46.863,88.519 46.863,94.742 J3.04@54.229,102.108 ; J14.1 80.666,97.143 78.836,98.973 57.618,98.973 J3.04@54.483,102.108 ; J3.04@54.229,102.108 J3.04@54.483,102.108 ; J3.04@54.229,102.108 J3.04@54.483,102.108
+12V: J13.2 S1.1B S2.1B S4.1A | length 94.5
  Top Layer w4: J13.2 30.353,94.361 S2.1B 36.773,89.662 39.116,92.005 39.116,93.472 S4.1A
  Bottom Layer w4: S4.1A 38.608,93.599 35.687,96.52 35.687,103.378 39.497,107.188 81.153,107.188 84.331,104.01 84.331,95.172 78.694,89.535 S1.1B
Echo1: J3.03 J9.3 U1.30 | length 114.2
  Top Layer w0.381: v1(37.994,42.164) 37.994,67.027 37.973,67.048 37.973,77.216 44.831,84.074 44.831,102.362 46.609,104.14 56.007,104.14 56.897,103.25 56.897,102.488 J3.03 ; U1.30 54.989,50.263 55.392,49.86 J9.3
  Bottom Layer w0.381: v1(37.994,42.164) 40.026,40.132 49.965,40.132 52.439,42.606 53.345,42.606 53.431,42.52 54.384,42.52 J9.3
Echo2: C7.2 J11.3 U1.7 Y1.3 | length 24
  Top Layer w0.381: U1.7 60.629,64.897 60.678,64.918 C7.2 61.042,64.918 61.27,64.918 62.484,63.703 64.821,63.703 65.062,63.944 ; v1(65.062,63.348) 65.062,63.944 ; Y1.3 65.062,63.944
  Bottom Layer w0.381: v1(65.062,63.348) 73.254,63.348 74.422,64.516 74.422,67.183 J11.3
Echo3: J7.4 J12.3 U1.16 | length 33.1
  Top Layer w0.381: U1.16 50.989,69.942 52.578,71.531 J7.4
  Bottom Layer w0.381: J12.3 39.014,71.16 38.784,70.93 38.784,65.296 39.014,65.066 51.206,65.066 52.578,66.438 J7.4
ENC_A_M1: P1.5 U1.32 | length 35
  Top Layer w0.381: U1.32 56.589,57.318 57.371,56.536 v1(61.3,56.536)
  Bottom Layer w0.381: v1(61.3,56.536) 61.3,52.832 62.701,51.43 85.466,51.43 P1.5
ENC_A_M2: P2.5 U1.1 | length 54.6
  Top Layer w0.381: P2.5 30.734,49.403 v1(30.734,44.577) ; U1.1 59.664,60.097 62.472,57.289 62.582,57.179 62.584,57.025 62.653,52.146 62.653,51.985 v1(61.468,50.8)
  Bottom Layer w0.381: v1(30.734,44.577) 31.623,43.688 51.869,43.688 51.955,43.774 53.829,43.774 53.915,43.688 54.356,43.688 v1(61.468,50.8)
ENC_B_M1: P1.6 U1.11 | length 54.3
  Top Layer w0.381: v1(54.762,68.834) 54.989,68.607 U1.11
  Bottom Layer w0.381: v1(54.762,68.834) 54.762,69.367 56.921,71.526 60.909,71.526 61.722,70.714 61.722,61.874 65.684,57.912 82.64,57.912 85.104,55.448 86.092,55.448 86.329,55.685 86.645,55.685 86.868,55.462 86.868,50.292 P1.6
ENC_B_M2: P2.6 U1.12 | length 43
  Top Layer w0.381: U1.12 54.189,65.877 54.864,65.202 v1(54.864,63.449)
  Bottom Layer w0.381: P2.6 39.014,49.022 41.061,51.068 41.061,62.586 41.924,63.449 v1(54.864,63.449)
GND: C2.1 C3.1 C4.1 C5.1 C6.1 C7.1 C8.1 C9.1 J3.06 J4.2 J5.1 J6.1 J7.6 J8.8 J9.1 J10.8 J11.1 J12.1 J13.1 J14.2 LED1.1 P1.3 P2.3 S3.4 U1.3 U1.5 U1.21 U2.3 Y1.2 Y1.4 | length 432.5
  Top Layer w0.381: P2.3 29.083,56.642 29.083,56.82 29.138,56.875 29.316,56.875 34.036,61.595 34.036,79.077 J6.1 ; P2.3@29.083,56.464 29.138,56.409 29.316,56.409 32.639,53.086 32.639,37.236 31.089,35.687 30.734,35.687 J8.8 ; J8.8@31.089,35.56 37.084,35.56 38.887,37.363 38.887,66.16 J12.1 39.878,62.586 41.008,61.456 C4.1 C3.1 ; J3.06 49.403,102.094 49.01,101.701 C9.1 49.01,96.952 50.038,95.924 50.038,93.76 48.338,92.06 48.338,91.96 47.979,91.601 LED1.1 48.929,90.551 53.15,90.551 U2.3 59.952,90.115 62.302,90.115 65.278,93.091 C8.1 ; U1.21 51.803,62.497 52.603,61.697 U1.3 58.081,61.655 59.527,61.655 C2.1 61.441,60.349 ; U1.5@58.053,63.283 60.489,63.283 C7.1 61.417,63.627 61.646,63.398 61.646,60.554 61.441,60.349 ; S3.4 S3.4@58.638,49.693 ; C5.1 59.334,70.993 62.048,73.707 J11.1 74.422,72.183 74.422,61.619 73.152,60.349 66.294,60.349 ; J9.1 58.582,43.322 58.582,49.637 S3.4@58.638,49.693 ; C6.1 62.209,65.323 63.077,65.323 Y1.2@63.462,64.938 ; Y1.2 Y1.2@63.462,64.938 ; Y1.4 Y1.4@65.062,66.888 ; J10.8 85.09,39.014 77.826,46.279 77.826,52.934 81.534,56.642 P1.3 ; S3.4@58.638,49.693 63.282,49.693 66.294,52.705 66.294,60.349 ; 61.441,60.349 66.294,60.349 ; Y1.2@63.462,64.938 63.462,65.1 65.062,66.7 Y1.4@65.062,66.888 ; Y1.4@65.062,66.888 65.447,66.503 66.071,66.503 66.294,66.28 66.294,60.349
  Bottom Layer w0.381: J8.8 42.164,35.56 ; J12.1 50.394,66.16 51.308,67.074 J7.6 ; J3.06 49.592,102.362 51.37,104.14 78.787,104.14 J14.2 ; J9.1 60.392,36.576 59.376,35.56 42.164,35.56 ; J11.1 77.55,78.359 J5.1 ; J10.8 86.03,35.814 86.284,35.56 86.284,27.229 83.185,24.13 53.467,24.13 52.705,24.892 J4.2 52.478,26.897 52.478,27.405 48.387,31.496 46.228,31.496 42.164,35.56
  other v2: 50,80 52,80 54,80 56,80 58,80 60,80 62,80 63,82 50,84 64,84 63,86 50,88 64,88 50,92 53,94 55,94 57,94 59,94 61,94 63,94 62,96 64,96
L_EN_D1: J8.4 U1.26 | length 45.2
  Top Layer w0.381: J8.4 36.576,30.48 42.037,35.941 42.037,55.753 43.18,56.896 51.566,56.896 51.789,57.119 U1.26
L_EN_D2: J10.4 U1.24 | length 85.6
  Top Layer w0.381: v1(39.781,42.418) 39.781,57.053 41.402,58.674 48.489,58.674 49.555,59.741 ; U1.24 U1.24@49.555,60.097 ; 49.555,59.741 U1.24@49.555,60.097 ; 49.555,59.741 U1.24@49.555,60.097
  Bottom Layer w0.381: v1(39.781,42.418) 41.051,41.148 50.155,41.148 52.197,43.19 53.587,43.19 53.673,43.104 57.111,43.104 57.781,43.774 82.921,43.774 83.82,42.875 83.82,31.039 84.125,30.734 J10.4
L_PWM_D1: J8.2 U1.10 | length 76.8
  Top Layer w0.381: U1.10 55.789,68.591 v1(55.905,68.707)
  Bottom Layer w0.381: J8.2 30.734,27.127 30.074,26.467 27.203,26.467 26.441,27.229 26.441,45.008 28.677,47.244 53.721,47.244 56.007,49.53 56.007,56.993 57.231,58.217 57.231,65.68 55.905,67.005 v1(55.905,68.707)
L_PWM_D2: J10.2 U1.14 | length 69.2
  Top Layer w0.381: U1.14 52.589,69.099 53.67,70.18 58.303,70.18 58.888,69.596 v1(59.055,69.596) ; v1(79.375,52.324) 79.375,51.054 86.284,44.145 86.284,29.388 J10.2
  Bottom Layer w0.381: v1(59.055,69.596) 59.055,60.833 67.564,52.324 v1(79.375,52.324)
MOSI: J7.1 U1.15 | length 9.2
  Top Layer w0.381: U1.15 51.789,69.544 53.518,71.272 v1(54.762,71.272)
  Bottom Layer w0.381: J7.1 54.458,73.66 54.762,73.355 v1(54.762,71.272)
NetC1_1: C1.1 J3.01 | length 36.6
  Top Layer w0.381: C1.1 66.294,82.03 66.294,99.949 63.881,102.362 J3.01
NetC8_2: C8.2 S4.1B U2.1 | length 30.7
  Top Layer w0.381: v1(50.263,99.978) 50.292,99.949 50.292,97.028 52.242,95.078 58.375,95.078 58.959,95.662 58.99,95.662 59.309,95.982 U2.1 63.457,97.342 C8.2
  Bottom Layer w0.381: S4.1B 49.022,101.219 v1(50.263,99.978)
NetJ1_1: J1.1 P1.1 | length 6.6
  Top Layer w3: J1.1 85.598,64.596 P1.1
NetJ1_2: J1.2 P1.2 | length 17.7
  Bottom Layer w3: J1.2 79.502,68.834 79.502,64.044 84.327,59.219 85.561,59.219 P1.2
NetJ2_1: J2.1 P2.1 | length 11.5
  Top Layer w3: P2.1 27.544,62.753 27.544,69.037 J2.1
NetJ2_2: J2.2 P2.2 | length 10.3
  Bottom Layer w3: P2.2@28.612,59.219 29.846,59.219 31.922,61.295 31.922,65.015 J2.2
NetJ5_2: J5.2 S1.1A | length 7.3
  Bottom Layer w4: J5.2 85.725,86.153 S1.1A
NetJ6_2: J6.2 S2.1A | length 13.2
  Top Layer w4: S2.1A 27.044,89.274 27.044,81.069 J6.2
NetLED1_2: LED1.2 R2.1 | length 7.4
  Top Layer w0.381: LED1.2 47.126,89.501 46.812,89.814 46.812,92.862 48.573,94.623 48.58,94.623 48.895,94.938 R2.1
R_EN_D1: J8.3 U1.25 | length 55.5
  Top Layer w0.381: J8.3 28.359,30.645 28.359,31.458 28.651,31.75 35.56,31.75 40.899,37.089 40.899,56.393 42.24,57.734 ; U1.25 U1.25@50.989,57.734 ; 42.24,57.734 U1.25@50.989,57.734 ; 42.24,57.734 U1.25@50.989,57.734
R_EN_D2: J10.3 U1.23 | length 60.5
  Top Layer w0.381: U1.23 50.787,60.897 v1(51.206,60.477) ; v1(54.257,49.044) 54.28,49.022 54.28,32.969 56.515,30.734 J10.3
  Bottom Layer w0.381: v1(51.206,60.477) 50.394,59.665 50.394,52.908 v1(54.257,49.044)
R_PWM_D1: J8.1 U1.9 | length 71.9
  Top Layer w0.381: U1.9 U1.9@56.589,66.7 ; U1.9@56.589,66.7 v1(57.815,66.7) U1.9@56.589,66.7
  Bottom Layer w0.381: J8.1 27.229,27.94 27.025,28.144 27.025,43.891 28.427,45.293 29.692,46.558 55.282,46.558 57.225,48.501 57.225,50.875 59.511,53.161 59.511,58.645 57.815,60.34 v1(57.815,66.7)
R_PWM_D2: J10.1 U1.13 | length 106.5
  Top Layer w0.381: v1(36.571,64.135) 36.571,63.967 36.881,63.658 36.881,40.335 v1(36.957,40.259) ; v1(53.389,65.022) U1.13
  Bottom Layer w0.381: v1(36.571,64.135) 52.502,64.135 v1(53.389,65.022) ; v1(36.957,40.259) 38.735,38.481 57.912,38.481 59.182,39.751 59.182,42.259 59.529,42.606 61.255,42.606 61.493,42.367 61.493,29.261 62.56,28.194 J10.1
RESET: C1.2 C5.2 J7.2 R1.1 S3.1 U1.29 | length 37.7
  Top Layer w0.381: R1.1 50.405,51.369 51.868,52.832 S3.1 53.112,54.193 54.189,55.27 U1.29 ; J7.2 54.915,72.39 56.3,71.005 C1.2 56.769,71.147 58.115,72.493 C5.2
  Bottom Layer w0.381: S3.1 51.868,57.075 56.083,61.29 56.083,64.567 53.848,66.802 J7.2
SCL: J4.3 U1.28 | length 42.4
  Top Layer w0.381: J4.3 49.974,26.67 44.323,32.321 44.323,54.102 45.593,55.372 52.705,55.372 53.389,56.056 U1.28
SDA: J4.4 U1.27 | length 42.4
  Top Layer w0.381: J4.4 43.132,31.163 43.132,55.07 44.196,56.134 52.057,56.134 52.589,56.666 U1.27
Trig1: J3.02 J9.2 U1.31 | length 113.8
  Top Layer w0.381: U1.31 55.789,57.292 57.201,55.88 57.201,42.245 57.892,41.553 57.892,40.584 58.522,39.954 71.196,39.954 75.311,44.069 75.311,102.235 73.406,104.14 61.341,104.14 J3.02
Trig2: C6.2 J11.2 U1.8 Y1.1 | length 20.8
  Top Layer w0.381: U1.8 59.22,65.697 59.745,66.222 59.745,67.873 60.071,68.199 C6.2 61.544,68.199 62.73,67.013 Y1.1 63.462,69.901 64.768,71.207 J11.2
Trig3: J7.3 J12.2 U1.17 | length 36.8
  Top Layer w0.381: J12.2 38.784,69.754 38.784,74.113 39.982,75.311 43.205,75.311 45.466,73.05 45.466,67.31 47.079,65.697 U1.17 ; U1.17@49.53,65.697 49.53,73.736 50.394,74.6 52.349,74.6 52.578,74.371 J7.3
pads on no net: J3.05 J8.5 J8.6 J10.5 J10.6 S3.2 S3.3 U1.2 U1.19 U1.22

## Polygon pours and split planes (outlines as drawn)
GND on Top Layer "GND_L01_P000" (solid, remove dead copper, pour order 0): 23.241,109.347 90.043,109.347 90.043,73.406 77.978,73.406 77.724,73.406 71.953,78.994 43.11,78.994 37.211,73.279 23.241,73.279
GND on Bottom Layer "GND_L02_P002" (solid, remove dead copper, pour order 2): 23.241,109.347 90.043,109.347 90.043,73.406 77.978,73.406 77.724,73.406 71.953,78.994 43.11,78.994 37.211,73.279 23.241,73.279

## Silkscreen, mask and mechanical layers (free items; w line width, h text height)
Top Overlay:
  drawing of 53 lines, arcs and shapes, not listed
  text "FTDI Adapter" at 51.712,106.462 h0.8
  text "GND CTS VCC Echo Trig RST" at 48.41,104.617 h0.6
  text "+5V   GND" at 86.718,95.781 h0.8 r90
  text "Main Switch" at 36.68,93.495 h0.8 r90
  text "+12V   GND" at 25.504,93.241 h0.8 r90
  text "Motor Driver 2 Switch" at 73.937,92.606 h0.8
  text "Motor Driver 1 Switch" at 23.772,86.129 h0.8
  text "GND   +12V" at 88.496,77.112 h0.8 r90
  text "+12V    GND" at 25.504,75.461 h0.8 r90
  text "M+  M-" at 88.242,67.968 h0.8 r90
  text "M-  M+" at 25.377,67.206 h0.8 r90
  text "GND Trig Echo VCC" at 36.861,65.301 h0.6 r90
  text "VCC Echo Trig GND" at 76.612,65.047 h0.6 r90
  text "Ultrasonic" at 36.345,60.602 h0.8
  text "Ultrasonic" at 69.492,60.348 h0.8
  text "RESET" at 58.951,51.839 h0.8
  text "ENC_B ENC_A VCC GND M- M+" at 88.65,47.775 h0.6 r90
  text "ENC_B ENC_A VCC GND M- M+" at 26.166,47.521 h0.6 r90
  text "Motor 1" at 26.439,45.87 h0.8
  text "Ultrasonic" at 55.542,45.836 h0.8
  text "Motor 2" at 83.081,45.743 h0.8
  text "Motor Driver 2" at 78.89,39.52 h0.8
  text "Motor Driver 1" at 24.661,39.393 h0.8
  text "R   L" at 27.455,37.996 h0.8
  text "R   L" at 82.319,37.869 h0.8
  text "VCC Echo Trig GND" at 52.093,36.926 h0.6
  text "MPU6050" at 48.918,28.725 h0.8
  text "PWM EN IS GND" at 87.988,27.074 h0.8 r90
  text "PWM EN IS VCC" at 25.616,26.89 h0.8 r90
  text "PWM EN IS VCC" at 80.368,26.82 h0.8 r90
  text "PWM EN IS GND" at 33.251,26.439 h0.8 r90
  text "SDA SCL GND VCC" at 46.505,24.026 h0.7
Mechanical 1:
  lines w0.254: 22.606,21.717 22.606,109.982 90.805,109.982 90.805,21.844 90.678,21.717 22.606,21.717